# Altium PCB PCB2.PcbDoc
Units mm, origin at the board's own origin, x right, y up, seen from the top; angles counter-clockwise.
Board outline 99.69 x 61.09 mm, 6 copper layers (Sig_1, PGND, VIN, VOUT, AGND, Sig_2), stack 1.937 mm thick; 34 components, 15 nets, 81 pads, 0 vias.
Unrouted connection lines stored in the file: 63.
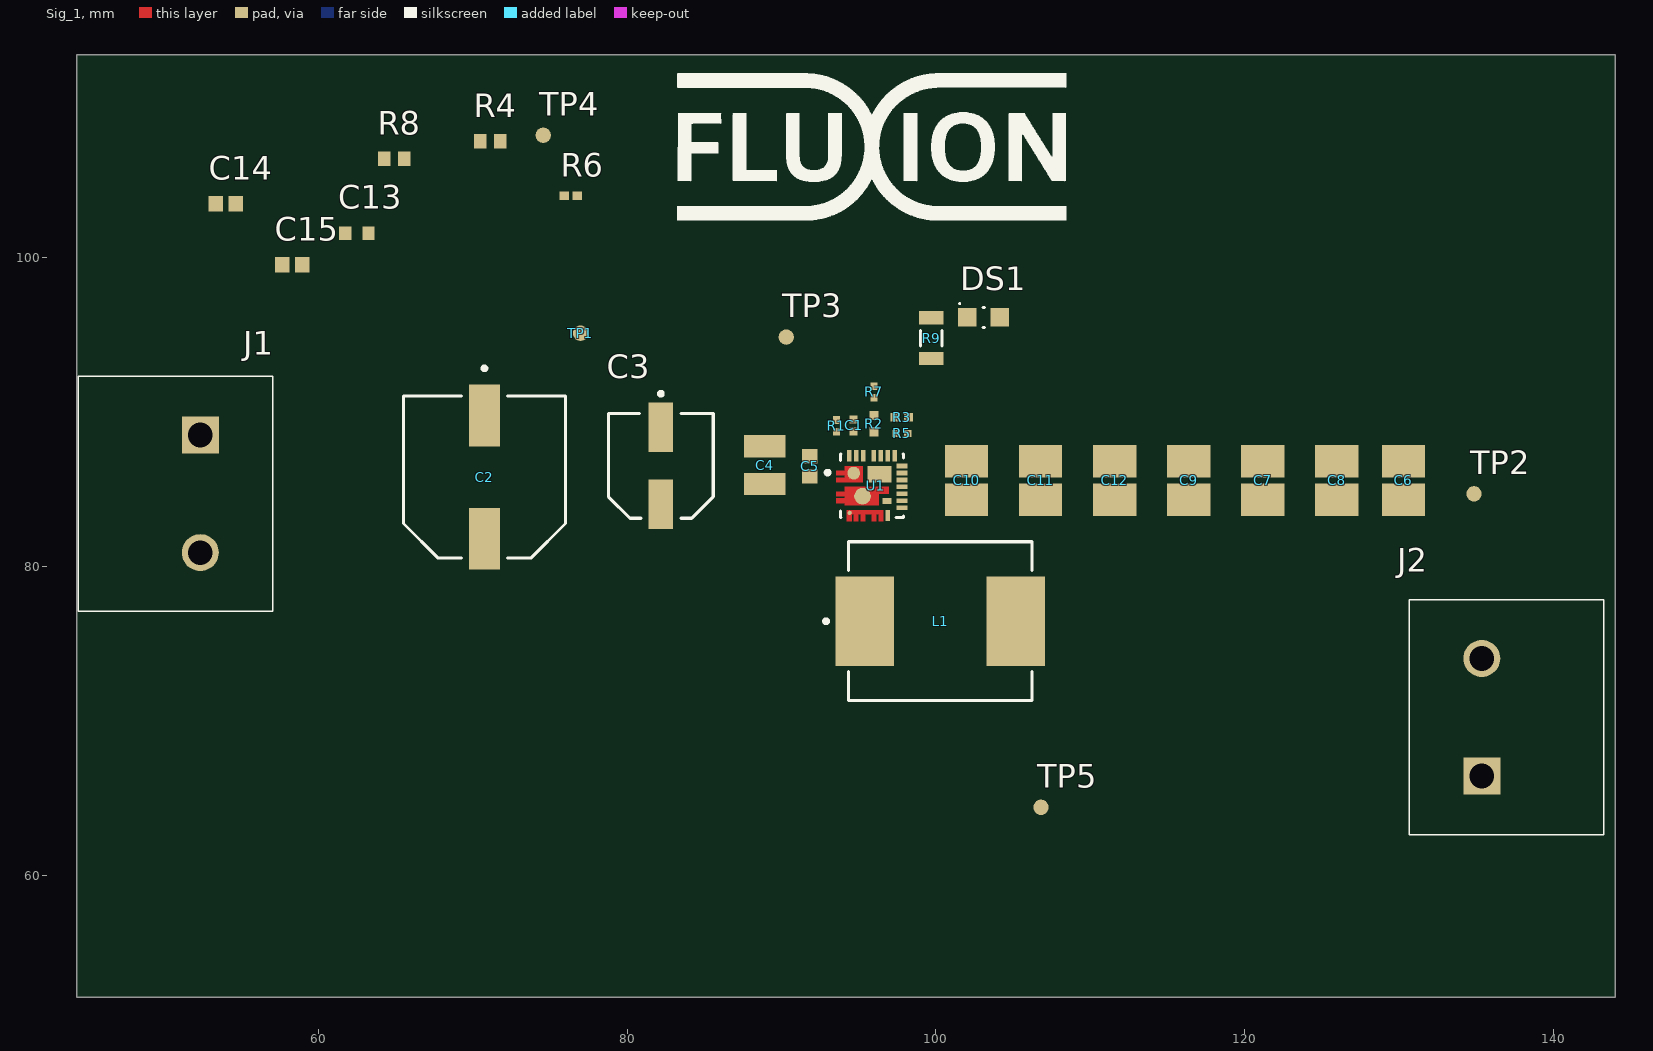
[diagram p0: Sig_1 view]
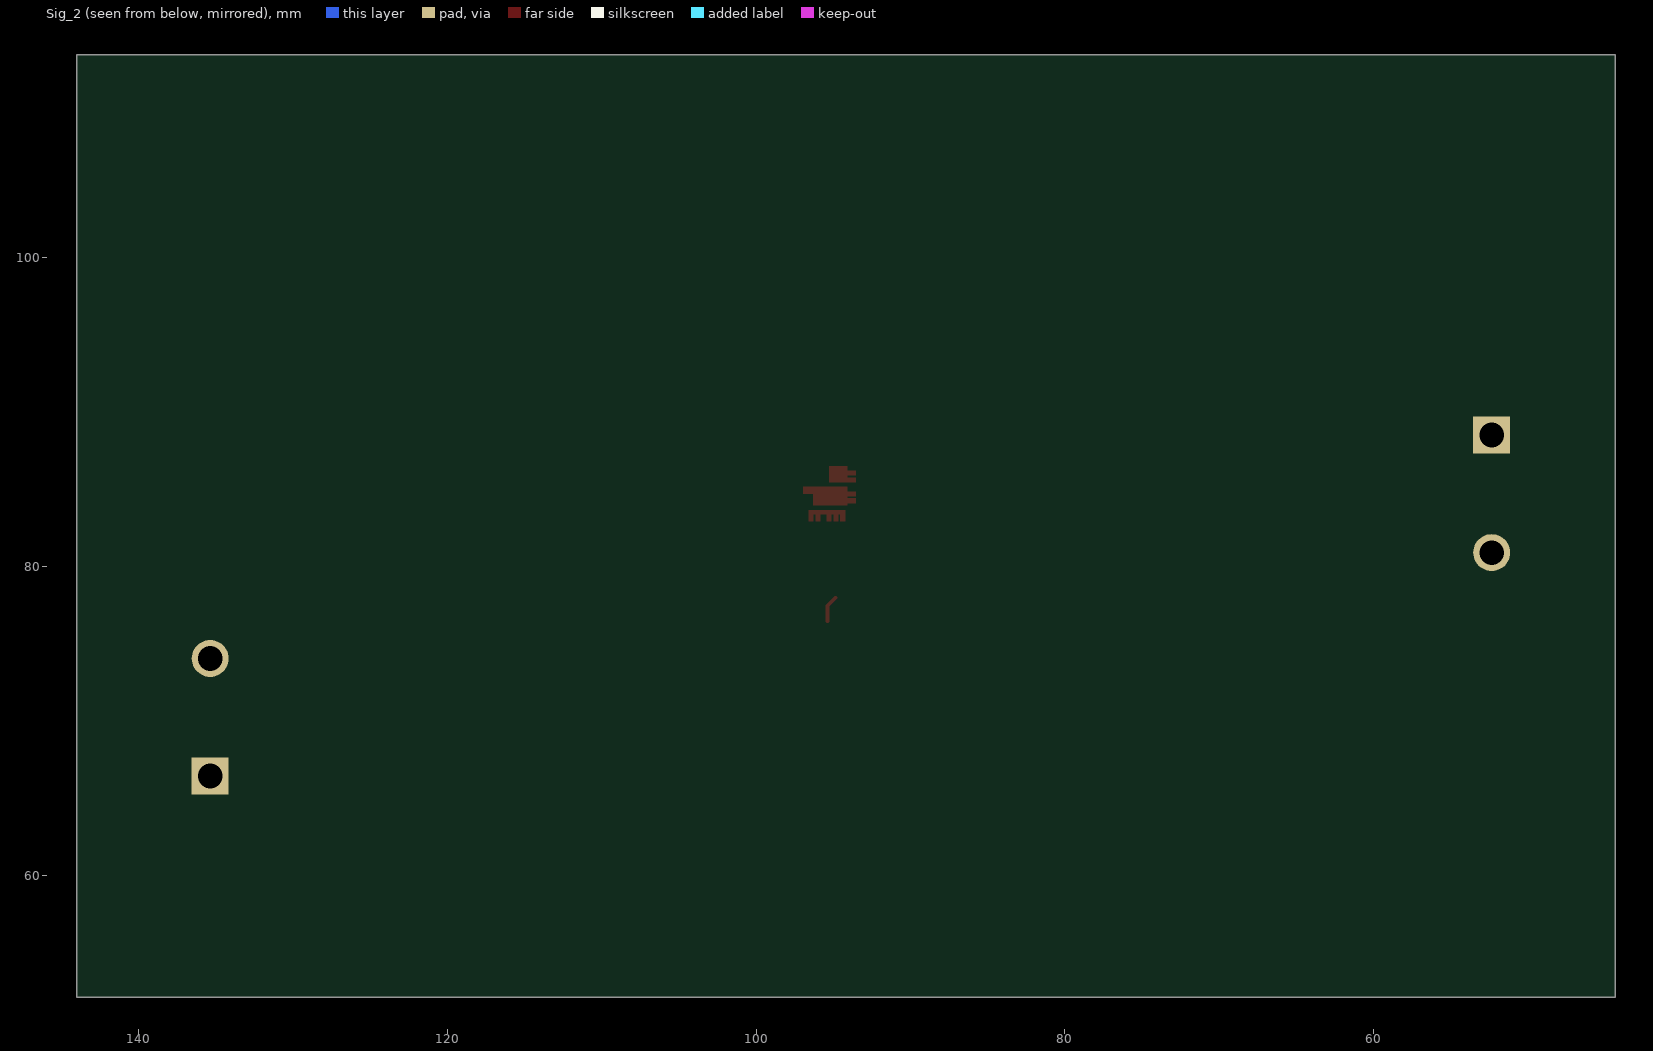
[diagram p1: Sig_2 view, seen from below]
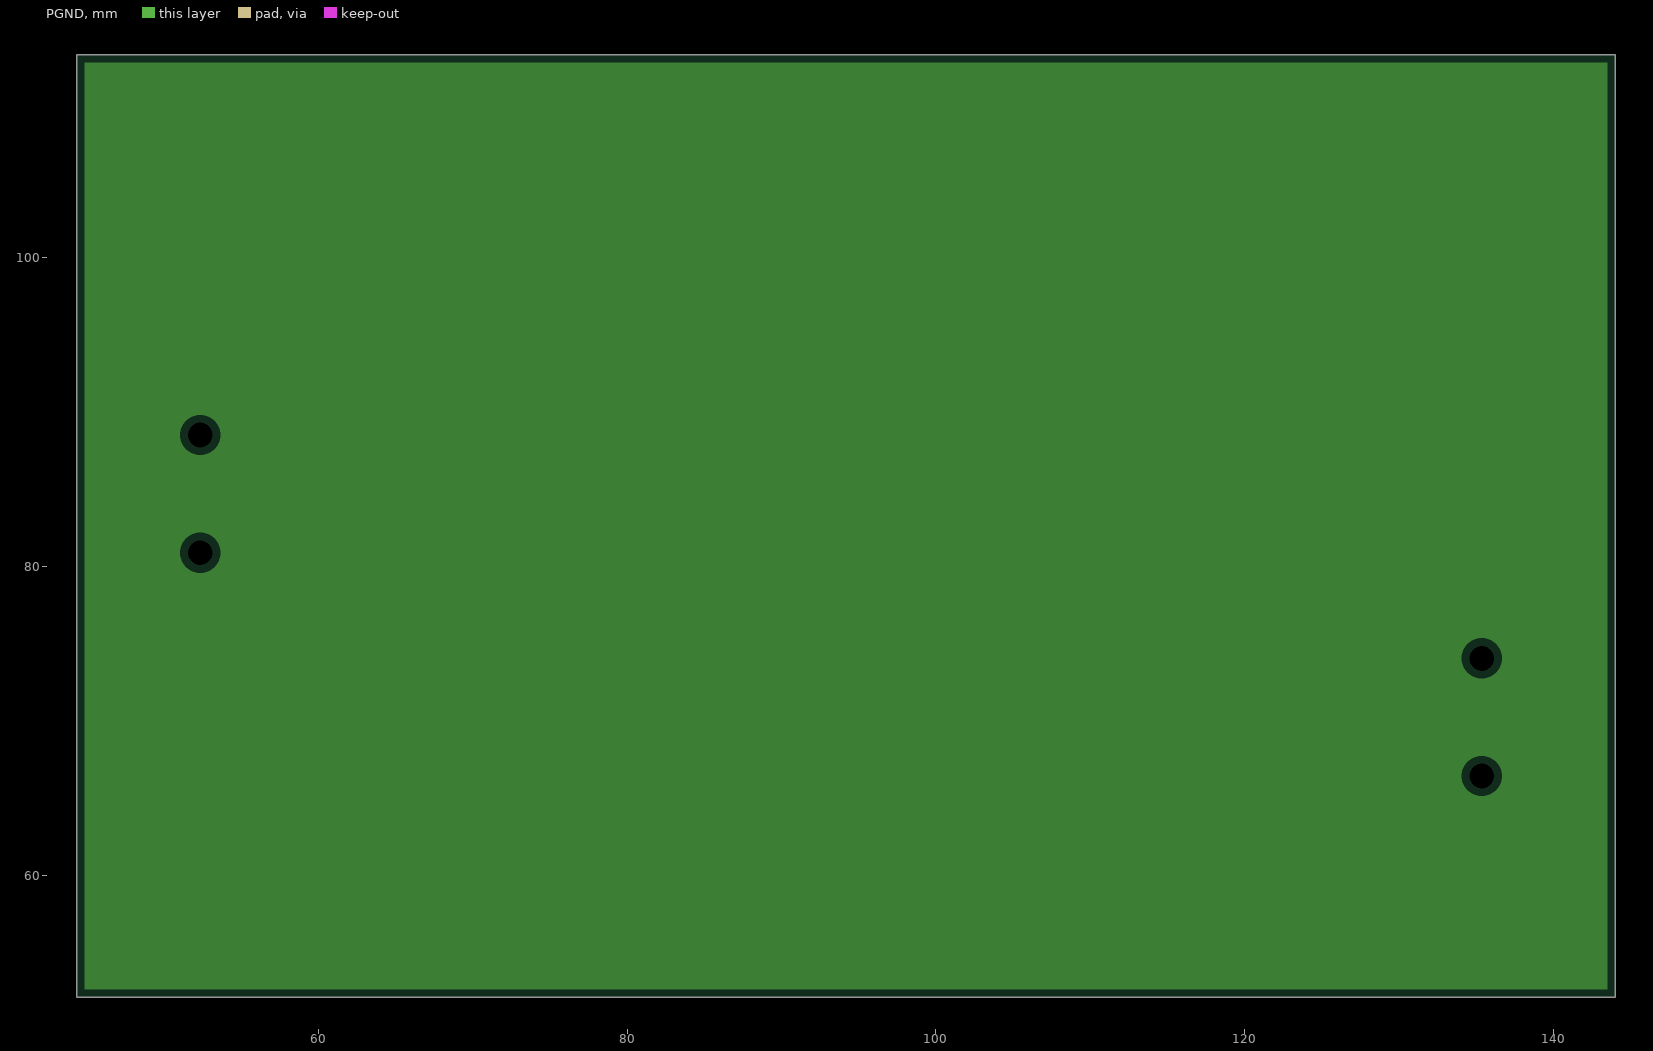
[diagram p2: PGND, clearances drawn from the general rule]
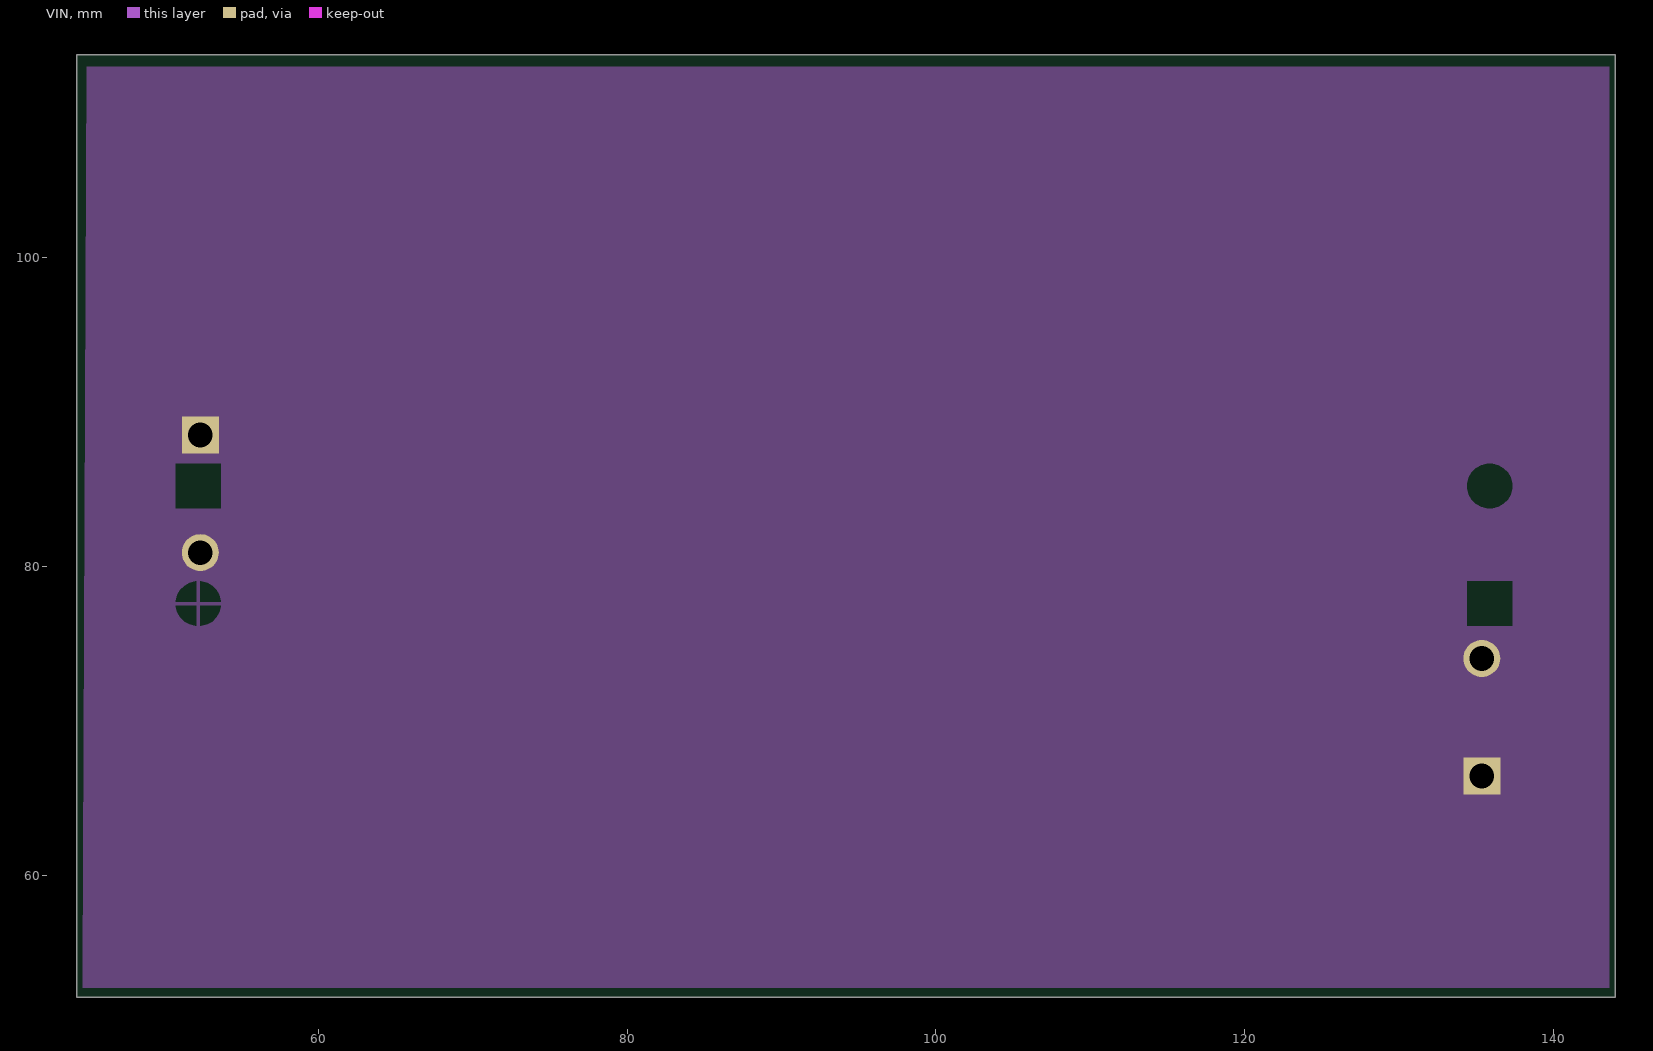
[diagram p3: VIN]
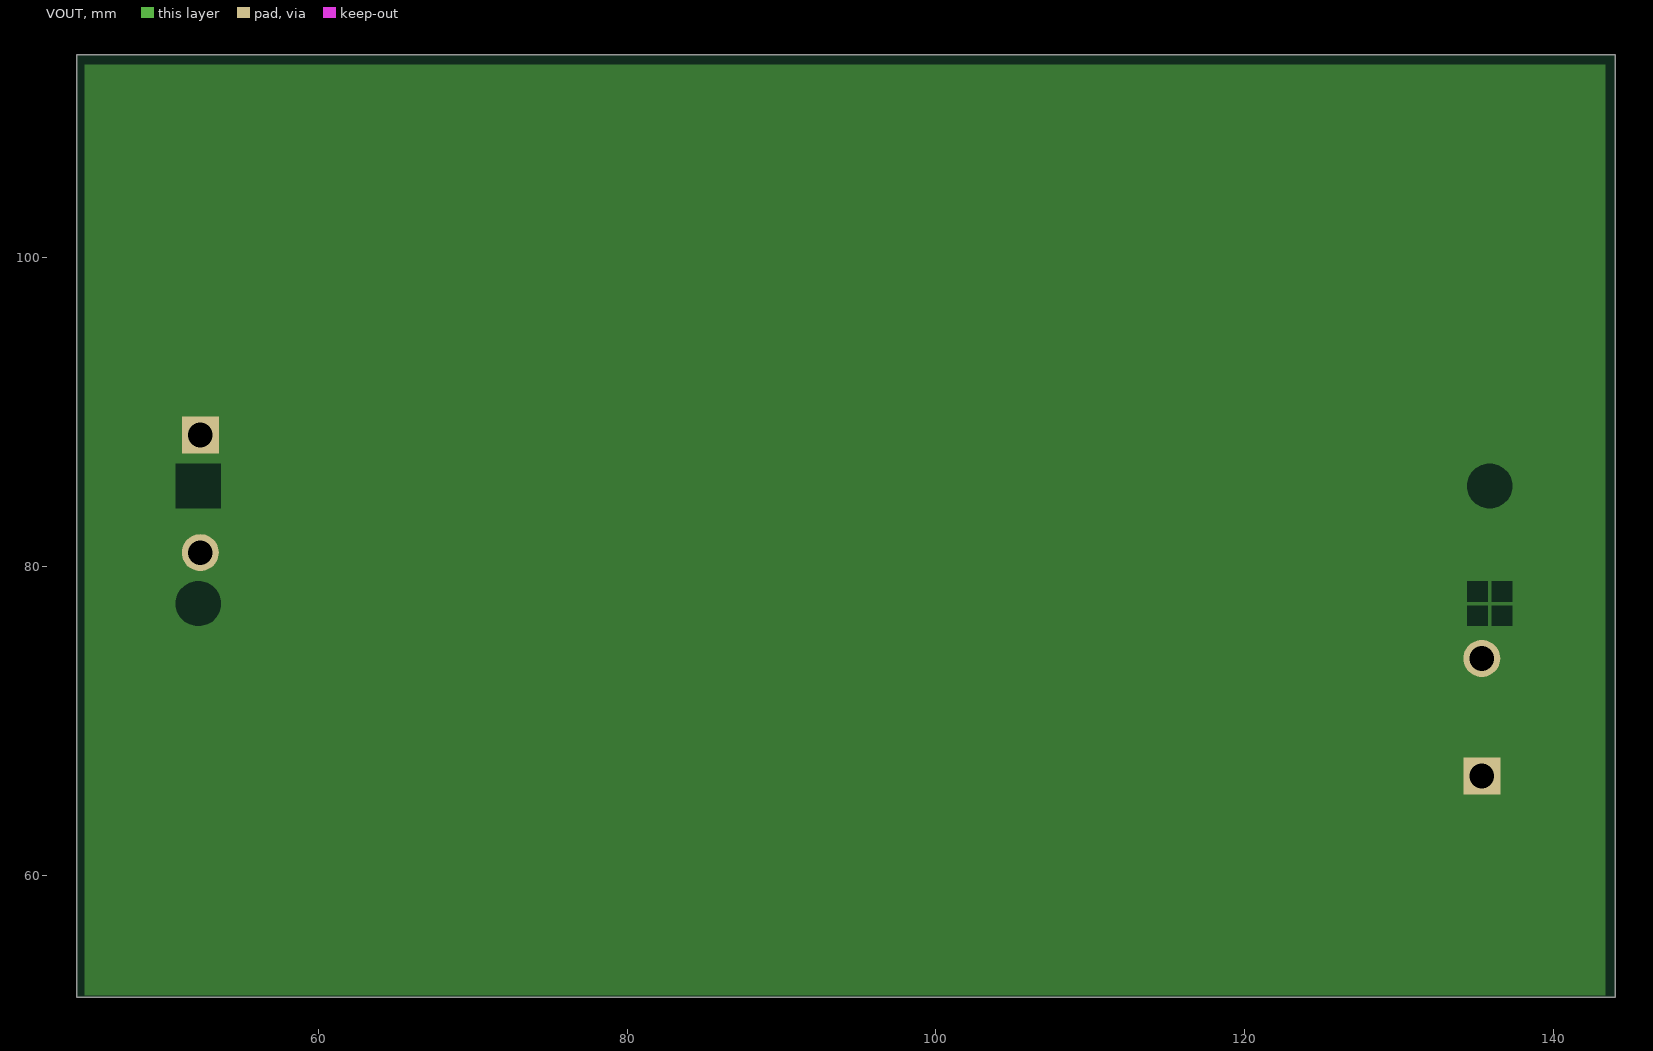
[diagram p4: VOUT]
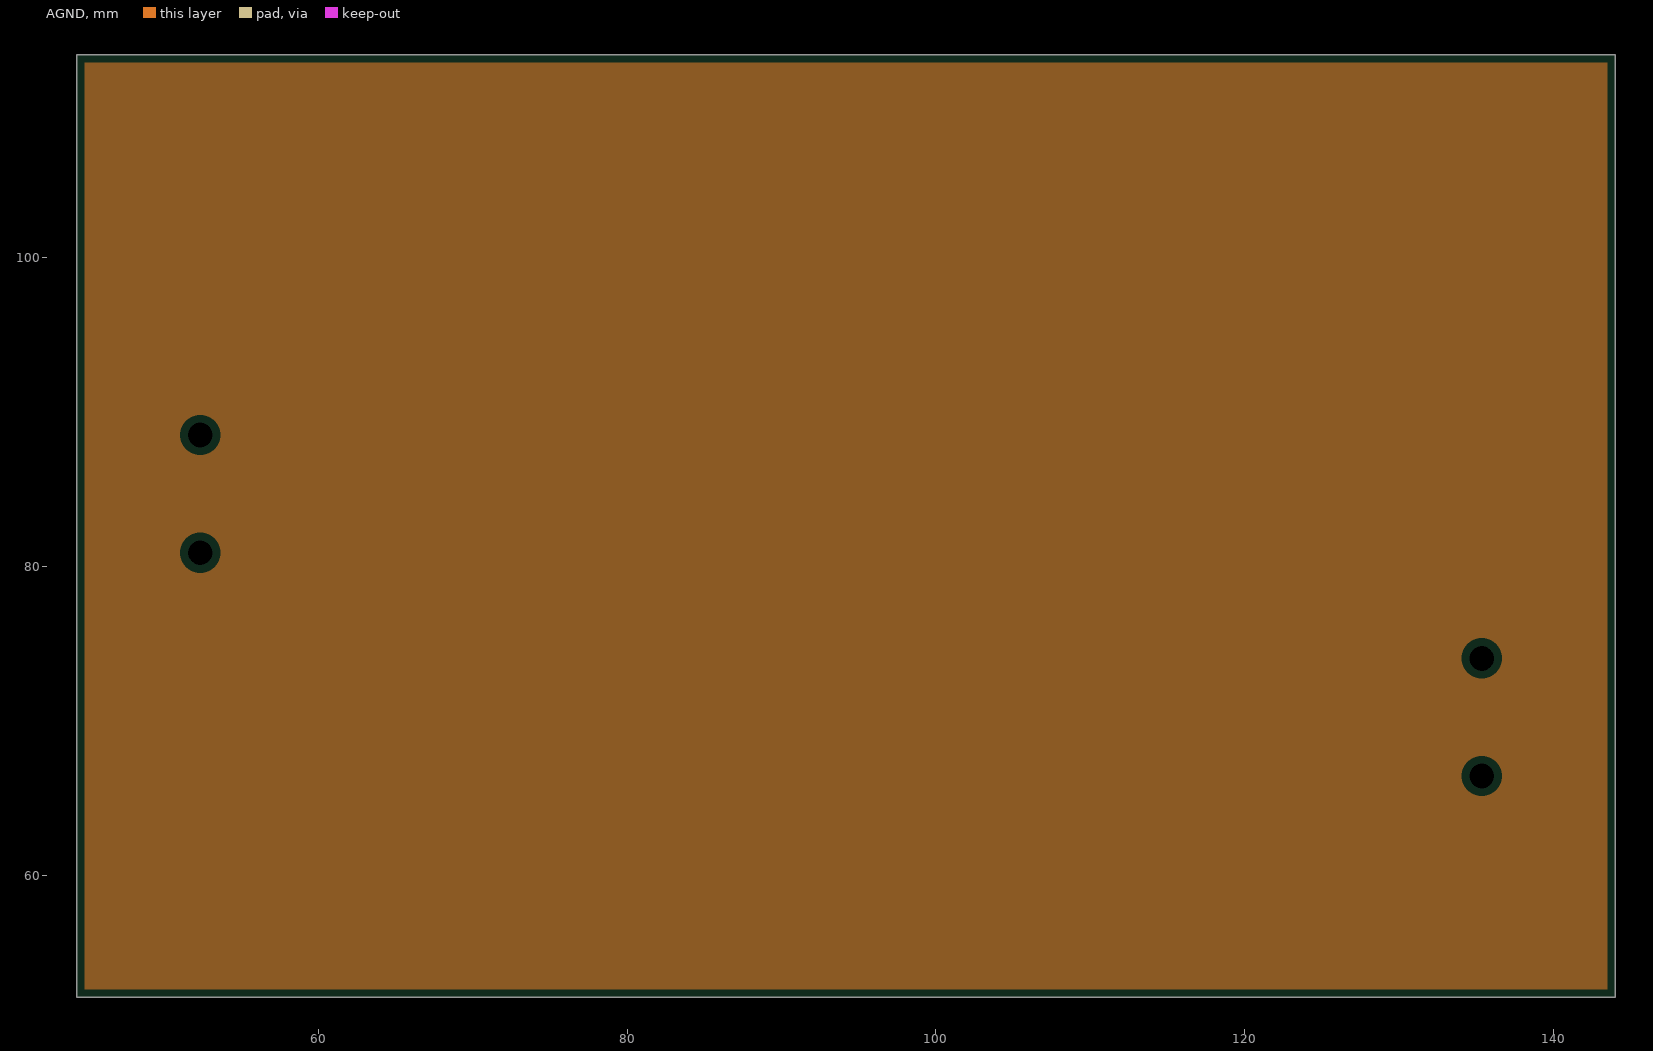
[diagram p5: AGND, clearances drawn from the general rule]

## Layer stack, top to bottom
Top Solder: solder mask 0.0254, SM-001, Dk 4
Sig_1: signal copper 0.035
Dielectric 1: prepreg 0.3, PP-006, Dk 4.1
PGND: plane copper 0.035
Dielectric 2: core 0.4572, Core-035, Dk 4.7
VIN: signal copper 0.07
Dielectric 4: prepreg 0.0711, PP-006, Dk 4.1
Dielectric 5: prepreg 0.0711, PP-006, Dk 4.1
VOUT: signal copper 0.07
Dielectric 3: core 0.4572, Core-035, Dk 4.7
AGND: plane copper 0.035, net GND
Dielectric 6: prepreg 0.3, PP-006, Dk 4.1
Sig_2: signal copper 0.035
Bottom Solder: solder mask 0.0254, SM-001, Dk 4

## Board outline
44.323,52.07 144.018,52.07 144.018,113.157 44.323,113.157

## Design rules (kind name [scope] priority, off if disabled: settings)
Clearance [All] p1: gap=0.245 ignorepadtopadclearanceinfootprint=TRUE
PlaneClearance [All] p1: clearance=0.508
PlaneConnect [All] p1: planeconnectstyle=Relief reliefexpansion=0.508 reliefentries=4 reliefconductorwidth=0.254 reliefairgap=0.254
PolygonConnect [All] p1: connectstyle=Relief reliefconductorwidth=0.254 reliefentries=4 polygonreliefangle="90 Angle" airgapwidth=0.254
RoutingVias [All] p1: holewidth=0.711 width=1.27 viastyle="Through Hole" minholewidth=0.711 minwidth=1.27 maxholewidth=0.711 maxwidth=1.27
SolderMaskExpansion [All] p1: expansion=0.102 istentingtop=FALSE
SupplyNets "Schematic Supply Nets_2" [InNet('+12')] p1: voltage=0.000
SupplyNets "Schematic Supply Nets_1" [InNet('+1V2')] p2: voltage=0.000
SupplyNets "Schematic Supply Nets" [InNet('GND')] p3: voltage=0.000
UnRoutedNet [All] p1: checkbadconnections=TRUE
Width [All] p1: maxlimit=0.254 minlimit=0.254 preferedwidth=0.254
27 further rules are at their usual default settings.

## Components (designator, comment, footprint, x,y, rotation, side; value= is the part's Value field where it differs from the comment)
C1 "100n" FP-C0402-BB-MFG 94.668,89.139 r90 top value="0.10 μF"
C2 "330u" FP-PCR1V331MCL1GS-MFG 70.739,85.789 r270 top value=330uF
C3 "47u" FP-FPD-MFG 82.169,86.527 r270 top
C4 "10u" FP-CL32-IPC_C 88.9,86.569 r90 top
C5 "100n" CAPC1608X95X40NL15T15 91.821,86.502 r270 top
C6 "47u" FP-GRM32E-0_3-0_2-IPC_A 130.302,85.579 r270 top
C7 "47u" FP-GRM32E-0_3-0_2-IPC_A 121.183,85.579 r270 top
C8 "47u" FP-GRM32E-0_3-0_2-IPC_A 125.984,85.579 r270 top
C9 "47u" FP-GRM32E-0_3-0_2-IPC_A 116.383,85.579 r270 top
C10 "47u" FP-GRM32E-0_3-0_2-IPC_A 101.981,85.579 r270 top
C11 "47u" FP-GRM32E-0_3-0_2-IPC_A 106.782,85.579 r270 top
C12 "47u" FP-GRM32E-0_3-0_2-IPC_A 111.582,85.579 r270 top
C13 "4u7" FP-CC0603-DA-MFG 62.472,101.6 r0 top value="4.7 uF"
C14 "1u" CAPC1608X95X40NL15T15 53.975,103.505 r0 top
C15 "100n" CAPC1608X95X40NL15T15 58.278,99.568 r0 top
DS1 "LTST-C170KGKT" LTST-LTST-C170KGKT-2_V 103.09,96.139 r0 top
J1 "TB005-762-02BE" TB00576202BE 52.324,88.519 r270 top
J2 "TB005-762-02BE" TB00576202BE 135.382,66.421 r90 top
L1 "560n" FP-FCUL1060-MFG 100.277,76.454 r0 top
R1 "3R3" RESC1005X40X25LL05T10 93.553,89.114 r90 top
R2 "562K" FP-CRCW0402-e3-MFG 95.978,89.264 r270 top
R3 "100K" RESC1005X40X25NL05T10 97.79,89.679 r180 top
R4 "10K" RESC1609X50X30NL8T20 71.12,107.569 r0 top
R5 "200K" RESC1005X40X25LL05T10 97.79,88.629 r0 top
R6 "100K" RESC1005X40X25NL05T10 76.327,104.013 r0 top
R7 "309K" RESC1005X40X25LL05T10 95.978,91.313 r270 top
R8 "10K" RESC1609X50X30NL8T20 64.897,106.426 r0 top
R9 "510R" RESC3116X65X40LL10T20 99.695,94.797 r270 top
TP1 "TP_VIN" PAD_RND_1MM 76.962,95.123 r90 top
TP2 "TP_NOBOM" PAD_RND_1MM 134.874,84.709 r90 top
TP3 "TP_NOBOM" PAD_RND_1MM 90.297,94.869 r90 top
TP4 "TP_NOBOM" PAD_RND_1MM 74.549,107.95 r90 top
TP5 "TP_NOBOM" PAD_RND_1MM 106.807,64.389 r90 top
U1 "SIC431AED-T1-GE3" FP-T22-0442-MFG 95.853,85.234 r0 top

## Footprints (in the part's own frame and the unit in brackets; to place one, negate y for a bottom-side part, rotate by r counter-clockwise, add the part's x,y. Pads: shape width x height; smd on the part's side, far side on the other; paste and mask are expansions set on the pad)
CAPC1608X95X40NL15T15 [mm] "Chip Capacitor, 2-Leads, Body 1.60x0.80mm, IPC Medium Density"
  rect 0.95x1 smd: 1(-0.65,0) 2(0.65,0)
  body extent -0.88,-0.48 0.87,0.47, height 0.95
FP-C0402-BB-MFG [mm]
  rect 0.52x0.52 smd paste+0 mask+0: 1(-0.4,0) 2(0.4,0)
  body extent -0.8,-0.4 0.8,0.4, height 0.25
FP-CC0603-DA-MFG [mm]
  rect 0.8x0.9 smd paste+0 mask+0: 1(-0.75,0) 2(0.75,0)
  body extent -1.35,-0.75 1.35,0.75, height 0.25
FP-CL32-IPC_C [mm]
  rect 1.453x2.704 smd paste+0 mask+0: 1(-1.225,0) 2(1.225,0)
  body extent -2.05,-1.5 2.05,1.5, height 0.25
FP-CRCW0402-e3-MFG [mm]
  rect 0.6x0.6 smd paste+0 mask+0: 1(-0.525,0) 2(0.525,0)
  body extent -0.92,-0.4 0.92,0.4, height 0.25
FP-FCUL1060-MFG [mm]
  rect 3.8x5.8 smd paste+0 mask+0: 1(-4.9,0) 2(4.9,0)
  silkscreen extent -7.52,-5.15 5.95,5.15, body extent -6.9,-5.25 6.9,5.25, height 0.25
FP-FPD-MFG [mm]
  rect 3.2x1.6 smd paste+0 mask+0: 1(-2.5,0) 2(2.5,0)
  silkscreen extent -4.8,-3.4 3.4,3.4, body extent -4.35,-3.65 4.35,3.65, height 0.25
FP-GRM32E-0_3-0_2-IPC_A [mm]
  rect 2.103x2.806 smd paste+0 mask+0: 1(-1.251,0) 2(1.251,0)
  body extent -2.8,-1.9 2.8,1.9, height 0.25
FP-PCR1V331MCL1GS-MFG [mm]
  rect 4x2 smd paste+0 mask+0: 1(-4,0) 2(4,0)
  silkscreen extent -7.17,-5.25 5.25,5.25, body extent -6.25,-5.5 6.25,5.5, height 0.25
FP-T22-0442-MFG [mm]
  round 0.827 smd paste+0 mask+0: 1-2-26(-1.184,0.816)
  round 1.08 smd paste+0 mask+0: 3-4-27(-0.613,-0.675)
  round 0.272 smd paste+0 mask+0: 5-6-7-8-9(-1.444,-1.756)
  rect 0.3x0.73 smd paste+0 mask+0: 10(1.025,-1.935)
  rect 0.725x0.3 smd paste+0 mask+0: 11(1.937,-1.425) 12(1.937,-0.975) 13(1.937,-0.525) 14(1.937,-0.075) 15(1.937,0.375) 16(1.937,0.825) 17(1.937,1.275)
  rect 0.3x0.725 smd paste+0 mask+0: 18(1.475,1.937) 19(1.025,1.937) 20(0.575,1.937) 21(0.125,1.937) 22(-0.575,1.937) 23(-1.025,1.937) 24(-1.475,1.937)
  rect 1.575x1.05 smd paste+0 mask+0: 25(0.487,0.75)
  rect 0.58x0.38 smd paste+0 mask+0: 28(0.985,-0.99)
  Sig_1 region: -1.625,-2.3 -1.625,-1.575 0.725,-1.575 0.725,-2.3 0.425,-2.3 0.425,-1.85 0.275,-1.85 0.275,-2.3 -0.025,-2.3 -0.025,-1.85 -0.425,-1.85 -0.425,-2.3 -0.725,-2.3 -0.725,-1.85 -0.875,-1.85 -0.875,-2.3 -1.175,-2.3 -1.175,-1.85 -1.325,-1.85 -1.325,-2.3
  Sig_1 region: -2.3,-0.375 -1.75,-0.375 -1.75,-0.075 1.075,-0.075 1.075,-0.53 0.425,-0.53 0.425,-1.275 -1.75,-1.275 -1.75,-1.125 -2.3,-1.125 -2.3,-0.825 -1.75,-0.825 -1.75,-0.675 -2.3,-0.675 -2.3,-0.375
  Sig_1 region: -2.3,0.975 -1.75,0.975 -1.75,1.275 -0.6,1.275 -0.6,0.225 -2.3,0.225 -2.3,0.525 -1.75,0.525 -1.75,0.675 -2.3,0.675 -2.3,0.975
  silkscreen extent -3,-2.05 2.05,2.05, body extent -2.4,-2.4 2.4,2.4, height 0.25
LTST-LTST-C170KGKT-2_V [mm] "SMD, 2-Leads, Body 2.00x1.25mm"
  rect 1.2x1.2 smd: 1(-1.05,0) 2(1.05,0)
  silkscreen extent -1.6,-0.65 0.05,0.95, body extent -1,-0.63 1,0.63, height 1.1
PAD_RND_1MM [mm]
  round 1 smd paste-0.5 mask+0: 1(0,0)
RESC1005X40X25LL05T10 [mm] "Chip Resistor, 2-Leads, Body 1.00x0.50mm, IPC High Density"
  rect 0.5x0.45 smd: 1(-0.375,0) 2(0.375,0)
  body extent -0.53,-0.27 0.53,0.28, height 0.4
RESC1005X40X25NL05T10 [mm] "Chip Resistor, 2-Leads, Body 1.00x0.50mm, IPC Medium Density"
  rect 0.6x0.55 smd: 1(-0.425,0) 2(0.425,0)
  body extent -0.53,-0.27 0.53,0.28, height 0.4
RESC1609X50X30NL8T20 [mm] "Chip Resistor, 2-Leads, Body 1.65x0.95mm, IPC Medium Density"
  rect 0.8x0.95 smd: 1(-0.65,0) 2(0.65,0)
  body extent -0.82,-0.48 0.82,0.48, height 0.5
RESC3116X65X40LL10T20 [mm] "Chip Resistor, 2-Leads, Body 3.10x1.60mm, IPC High Density"
  rect 0.85x1.6 smd: 1(-1.325,0) 2(1.325,0)
  silkscreen extent -0.5,-0.7 0.5,0.7, body extent -1.6,-0.85 1.6,0.85, height 0.65
TB00576202BE [mm]
  rect 2.4x2.4 hole 1.6: 1(0,0)
  round 2.4 hole 1.6: 2(7.62,0)
  silkscreen extent -3.81,-7.9 11.43,4.7, body extent -4.46,-7.9 11.38,4.7, height 21.7

## Part data
C1: library part CMP-03020-000918-1, "C0402 0.10 μF X5R 10.00% 10 V", Capacitance="0.10 μF", Manufacturer=Kemet, Manufacturer_Part_Number=C0402C104K8PAC, Package=C0402-BB, Temperature="-55°C to +125°C", Temperature Characteristic=X5R, Temperature Coefficient=15%, Temperature Range High=+125°C, Temperature Range Low=-55°C, Tolerance=0.1, Voltage Rating="10 V", Automotive=No, Category=Cap, ComponentLink2Description=Datasheet, ComponentLink2URL=https://content.kemet.com/datasheets/KEM_C1002_X7R_SMD.pdf, Device Class L1="Passive Components", Device Class L2=Capacitors, Device Class L3="Ceramic Capacitors", Height=0.55mm, Ipc Land Pattern Name=CAPC10050X50, Lead Free=Yes, Material=Ceramic, Mouser Description="Cap-fxd 0.1UF +-10PCT 10V Cer X5R 0402 S", Octopart=https://octopart.com/c0402c104k8pac-kemet-2645080, RoHS=TRUE
C2: library part CMP-12462-000009-1, "CAP ALUM POLY 330UF 20% 35V SMD", Capacitance=330uF, Leakage Current=346.5uA, Manufacturer=Nichicon, Manufacturer_Part_Number=PCR1V331MCL1GS, Package=0, Ripple Current=3900mA, Temperature="-55°C to +125°C", Temperature Range High=+125°C, Temperature Range Low=-55°C, Tolerance=20%, Voltage Rating=35V, Automotive=Yes, Automotive Grade="Grade 1", Category=Cap, ComponentLink2Description=Datasheet, ComponentLink2URL=https://products.nichicon.co.jp/en/pdf/XJA042/e-pcr.pdf, Device Class L1="Passive Components", Device Class L2=Capacitors, Device Class L3="Aluminum Electrolytic Capacitors", Digikey Description="CAP ALUM POLY 330UF 20% 35V SMD", Dissipation Factor=8%, Esr=16mΩ, Footprint Url=https://products.nichicon.co.jp/en/pdf/XJA042/e-p_ref.pdf, Height=12.7mm, Lead Free=Yes, Life=4000Hours, Material=Aluminum, Octopart=https://octopart.com/pcr1v331mcl1gs-nichicon-34508554, RoHS=TRUE
C3: library part CMP-2000-06216-2, "CAP ALUM 47UF 20% 35V SMD", Capacitance=47uF, Case/Package=Radial, ESR (Equivalent Series Resistance)=260mR, Leakage Current=3uA, Manufacturer_Part_Number=EEE-FP1V470AP, Max Operating Temperature=105°C, Min Operating Temperature=-55°C, Package Quantity=1, Ripple Current=300mA, Tolerance=20%, Voltage=35V, Construction=Cylindrical, Contact Plating=Tin, Diameter=6.3mm, Dissipation Factor=0.12%, Height=5.8mm, Height - Seated (Max)=0.228inch, Lead Free="Lead Free", Lead Pitch=1.8mm, Length=5.8mm, Life (Hours)=2000Hour, Material=Aluminium, Mount="Surface Mount", Number of Pins=2, Packaging="Tape and Reel", Radiation Hardening=No, REACH SVHC="No SVHC", Ripple Current (AC)=300mA, RoHS Compliant=Yes, Series=FP, Termination=SMD/SMT, Voltage Rating=35V, Voltage Rating (DC)=35V
C4: library part CMP-2000-06110-2, "Cap Ceramic 10uF 50V X7R ±10% SMD 1210 +125°C Embossed T/R", Capacitance=10uF, Case Code (Imperial)=1210, Case Code (Metric)=3225, Dielectric=X7R, Manufacturer_Part_Number=CL32B106KBJNNNE, Max Operating Temperature=125°C, Min Operating Temperature=-55°C, Package Quantity=1, Tolerance=10%, Voltage=50V, Case/Package=1210, Depth=2.5mm, Height=2.5mm, Lead Free="Lead Free", Length=3.2mm, Material=Ceramic, Mount="Surface Mount", Packaging="Tape and Reel", Radiation Hardening=No, Thickness=0.106inch, Voltage Rating=50V, Voltage Rating (DC)=50V, Width=0.098inch
C5 C15: library part CMP-1035-02584-2, Manufacturer=Vitramon, Manufacturer_Part_Number=VJ0603Y104KXJCW1BC
C6 C7 C8 C9 C10 C11 C12: library part CMP-1662-00023-3, "Chip Multilayer Ceramic Capacitors for General Purpose, 1210, 47uF, X7R, 15%, 10%, 10V", Capacitance=47uF, Case Code (Imperial)=1210, Case Code (Metric)=3225, Dielectric=X7R, Manufacturer_Part_Number=GRM32ER71A476KE15L, Max Operating Temperature=125°C, Min Operating Temperature=-55°C, Package Quantity=1, Tolerance=10%, Voltage=10V, Case/Package=1210, Depth=2.5mm, Height=2.5mm, Lead Free="Lead Free", Length=3.2mm, Material=Ceramic, Mount="Surface Mount", Number of Pins=2, Packaging="Tape and Reel", Radiation Hardening=No, REACH SVHC="No SVHC", Termination=SMD/SMT, Thickness=0.106inch, Voltage Rating=10V, Voltage Rating (DC)=10V, Width=2.5mm
C13: library part CMP-03422-000495-1, "CAP CER 4.7UF 6.3V X5R 0603", Capacitance="4.7 uF", Manufacturer=YAGEO, Manufacturer_Part_Number=CC0603KRX5R5BB475, Package=CC0603-DA, Temperature="-55°C to +125°C", Temperature Characteristic=X5R, Temperature Coefficient=15%, Temperature Range High=+125°C, Temperature Range Low=-55°C, Tolerance=0.1, Voltage="6.3 V", Automotive=No, Category=Cap, ComponentLink2Description=Datasheet, ComponentLink2URL=http://www.yageo.com/documents/recent/UPY-GPHC_X7R_6.3V-to-50V_18.pdf, Device Class L1="Passive Components", Device Class L2=Capacitors, Device Class L3="Ceramic Capacitors", Digikey Description="CAP CER 4.7UF 6.3V X5R 0603", Footprint Url=http://www.yageo.com/exep/pages/download/literatures/UPY-C_GEN_24.pdf, Height=0.9mm, Lead Free=Yes, Material=Ceramic, Mouser Description="Multilayer Ceramic Capacitor, CC Series, 4.7 - F, - 10%, X5R, 6.3 V, 0603 [1608 Metric]", Octopart=https://octopart.com/cc0603krx5r5bb475-yageo-42244632, RoHS=TRUE, Voltage Rating="6.3 V"
C14: library part CMP-2006-00046-1, Manufacturer=Vitramon, Manufacturer_Part_Number=VJ0603G105KXYCW1BC
DS1: library part CMP-2000-06620-1, "Ultra Bright AlInGaP Chip LED, 75 mW, -55 to 85 degC, 2-Pin SMD (0805), RoHS, Tape and Reel", Emitting Color=YellowGreen, Forward Current=30mA, Forward Voltage=2.4V, Manufacturer=Lite-On, Operating Temp Range=-55Cto85C, Operating Temperature Classification=Industrial, Package Description="2-Pin Surface Mounted Device, Body 2 x 1.25 mm", Package Reference=LTST-C170KGKT-2, Package Type=ChipLed, Power Dissipation=75W, Power Dissipation Max=75mW, Reverse Voltage=5V, Test Current (It)=20mA, Chip Material=AlGaInP, Datasheet URL=http://optoelectronics.liteon.com/upload/download/DS22-2000-073/S_110_LTST-C170KGKT.pdf, Datasheet Version="Rev. G, 06/2005", DELETED=Compliant, Dominant Wave Length=571nm, Forward Current Max=30mA, High Brightness=Yes, Lens Dimensions=1.4x1.25x0.6mm, Lum Intensity=35mcd, Luminous Intensity=35mcd, Main Category=ChipLED, Manufacturer URL=http://www.us.liteon.com/, Manufacturer_Part_Number=LTST-C170KGKT, Mounting=SurfaceMount, Mounting Technology=SurfaceMount, Number of  Elements=1, Packaging=TapeandReel, Peak Wavelength=574nm, Pin Count=2, Product Depth (mm)=1.25mm, Product Height (mm)=1.1mm, Product Length (mm)=2mm, Rad Hardened=No, Shape Type=Rectangular, Type=Uni-Color, Viewing Angle=130deg
J1 J2: "Connector", Manufacturer_Name="Same Sky", Mouser Part Number=490-TB005-762-02BE, Arrow Part Number=TB005-762-02BE, Arrow Price/Stock=https://www.arrow.com/en/products/tb005-762-02be/cui-devices?utm_currency=USD&region=nac, Datasheet Link=https://www.sameskydevices.com/product/resource/supplyframepdf/tb005-762.pdf, Height=21.7mm, Manufacturer_Part_Number=TB005-762-02BE, Mouser Price/Stock=https://www.mouser.co.uk/ProductDetail/Same-Sky/TB005-762-02BE?qs=vLWxofP3U2zXv1H2wuShow%3D%3D
L1: library part CMP-06042-016308-1, "FIXED IND", Manufacturer_Part_Number=FCUL1060-H-R56M=P3, RoHS Compliant=Yes
R1: library part CMP-2002-07619-1, Manufacturer="Yageo / Phycomp", Manufacturer_Part_Number=RC0402FR-0733RL
R2: library part CMP-2002-00099-2, "RES Thick Film, 562kΩ, 1%, 0.063W, 100ppm/°C, 0402", Case Code (Imperial)=0402, Case Code (Metric)=1005, Manufacturer_Part_Number=CRCW0402562KFKED, Max Operating Temperature=155°C, Max Power Dissipation=63mW, Min Operating Temperature=-55°C, Package Quantity=10, Resistance=562kR, Temperature Coefficient=100ppm/°C, Tolerance=1%, Voltage Rating=50V, Case/Package=0402, Composition="Thick Film", Contact Plating=Tin, Depth=0.5mm, Features="Automotive AEC-Q200", Height=0.35mm, Lead Free="Lead Free", Length=1mm, Military Standard=Not, Mount="Surface Mount", Number of Pins=2, Number of Terminations=2, Packaging="Tape and Reel", Power Rating=63mW, Radiation Hardening=No, Termination=SMD/SMT, Voltage Rating (DC)=50V, Weight=2.3E-05oz, Width=0.02inch
R3 R6: library part CMP-2002-07343-1, Manufacturer="Yageo / Phycomp", Manufacturer_Part_Number=RC0402FR-07100KL
R4 R8: library part CMP-1666-00005-4, "Chip Resistor, 10 KOhm, +/- 1%, 100 mW, -55 to 155 degC, 0603 (1608 Metric), RoHS, Tape and Reel", Manufacturer="Vishay Semiconductor", Manufacturer_Part_Number=CRCW060310K0FKEA, Max Operating Temperature="155 degC", Min Operating Temperature="-55 degC", Package Quantity=5000, Voltage Rating="75 V", ComponentLink1Description="Manufacturer URL", ComponentLink1URL=http://www.vishay.com/, ComponentLink2Description=Datasheet, ComponentLink2URL=https://datasheet.ciiva.com/11809/0900766b80d98afc-11809037.pdf, DatasheetVersion=06/2012, Height="0.45 mm", Length="1.55 mm", Mounting Technology="Surface Mount", PackageDescription="2-Pin Surface Mount Device, Body 1.575 x 0.85 mm", PackageReference=0603, Packaging="Tape and Reel", REACH SVHC=Unknown, RoHSCompliant=true
R5: library part CMP-2002-07497-1, Manufacturer="Yageo / Phycomp", Manufacturer_Part_Number=RC0402FR-07200KL
R7: library part CMP-2002-07598-1, Manufacturer=Yageo, Manufacturer_Part_Number=RC0402FR-07309KL
R9: library part CMP-2003-03988-1, Manufacturer=RC1206JR-07510RL, Manufacturer_Part_Number=RC1206JR-07510RL
TP1 TP2 TP3 TP4 TP5: library part TEST_POINT_RND_1MM, "Test Point Round 1mm (NO BOM)"
U1: library part CMP-00030-87948104-1, "SIC431AED-T1-GE3 IC Reg Buck Adj 24A MLP44-24", Ambient Temperature Range High=105°C, Max Junction Temperature (Tj)=125°C, Max Supply Voltage=24V, Min Operating Temperature=-40°C, Min Supply Voltage=3V, Output Current=24A, Output Voltage=20V, Height=800µm, Manufacturer_Part_Number=SIC431AED-T1-GE3, Max Operating Temperature=125°C, NexarPartId=87948104, Number of Outputs=1, RoHS=Non-Compliant, Schedule B="8542390000, 8542390000"

## Nets (pads, with @x,y where several pads share a name; then routed paths per layer and width w, separated by ;. In a path a pad name is that pad's centre, name@x,y a point inside that pad or via, vN(x,y) a via of type N, cw(c..) or ccw(c..) an arc to the next point about the centre after c; other vN are vias at no path point)
+1V2: C6.1 C7.1 C8.1 C9.1 C10.1 C11.1 C12.1 C15.2 J2.1 L1.2 R4.1 TP4.1 U1.18
+12: C2.2 C3.2 C4.1 C5.2 J1.2 R2.2 R9.2 TP1.1 U1.1-2-26 U1.15 U1.22
Boot: C1.1 U1.23
FB: R4.2 R8.2 TP3.1 U1.17
GND: C2.1 C3.1 C4.2 C5.1 C6.2 C7.2 C8.2 C9.2 C10.2 C11.2 C12.2 C13.2 C14.1 C15.1 DS1.1 J1.1 J2.2 R7.1 R8.1 TP5.1 U1.3-4-27 U1.13 U1.16 U1.25
IC_EN: R2.1 R7.2 U1.19
IC_Phase: R1.1 U1.24
MODE2: R5.1 U1.20
MODE3: R3.2 U1.21
NetC1_2: C1.2 R1.2
NetC14_2: C14.2 R6.2
NetDS1_2: DS1.2 R9.1
PGOOD: R6.1 U1.14
SW: L1.1 TP2.1 U1.5-6-7-8-9 | length 1.7
  Sig_1 w0.254: L1.1@94.86,77.971 95.377,77.454 L1.1
VDRV: C13.1 R3.1 R5.2 U1.12
pads on no net: U1.10 U1.11 U1.28

## Polygon pours and split planes (outlines as drawn)
+1V2 on VOUT "+1V2_L04_P000" (solid, pour order 0): 44.831,52.197 44.831,112.522 143.383,112.522 143.383,52.197
+12 on VIN "+12_L03_P001" (solid, pour order 1): 44.958,112.395 143.637,112.395 143.637,52.705 44.704,52.705 44.704,53.721
no net on PGND (split plane): 143.508,52.58 44.833,52.58 44.833,112.647 143.508,112.647
no net on AGND (split plane): 143.508,52.58 44.833,52.58 44.833,112.647 143.508,112.647

## Silkscreen, mask and mechanical layers (free items; w line width, h text height)
Top Overlay:
  drawing of 7 lines, arcs and shapes, not listed